# Altium PCB PCB1.PcbDoc
Units mil, origin at the board's own origin, x right, y up, seen from the top; angles counter-clockwise.
Board outline 860.03 x 640.03 mil, 2 copper layers (Top Layer, Bottom Layer); 10 components, 6 nets, 25 pads, 0 vias.
Unrouted connection lines stored in the file: 1.
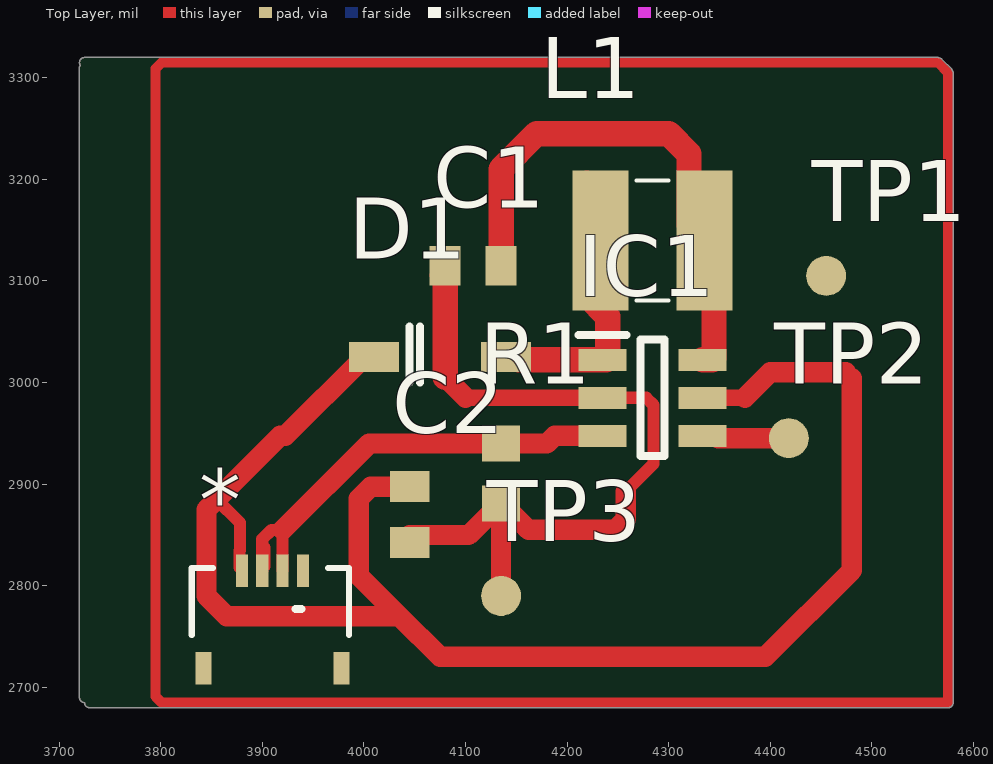
[diagram p0: Top Layer view]
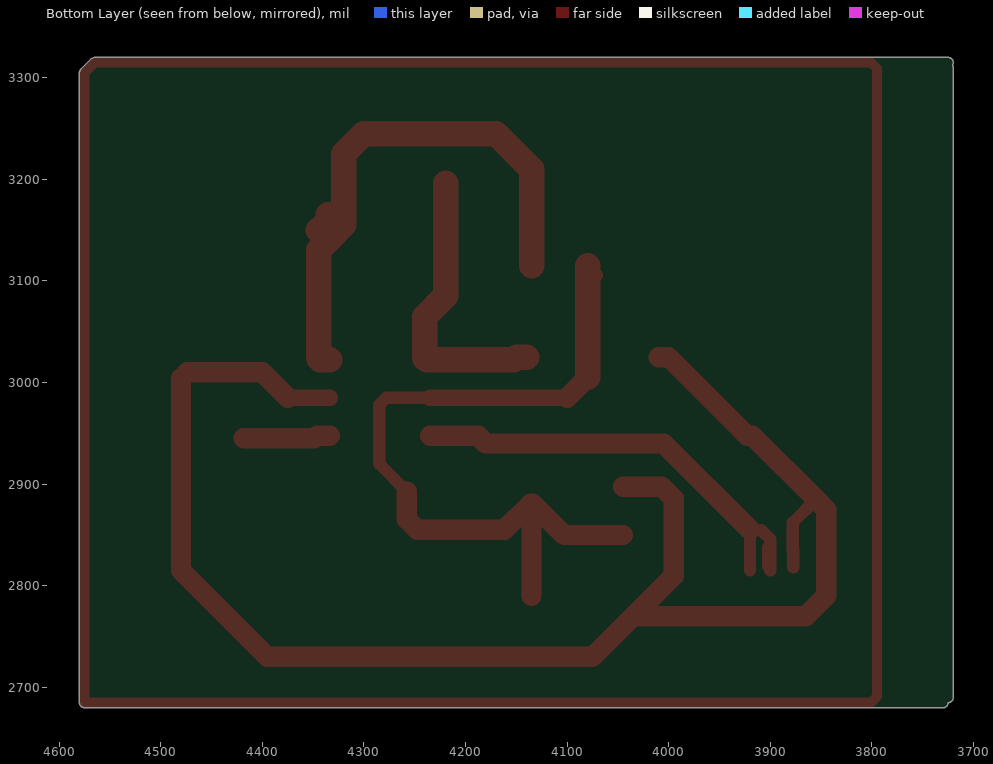
[diagram p1: Bottom Layer view, seen from below]
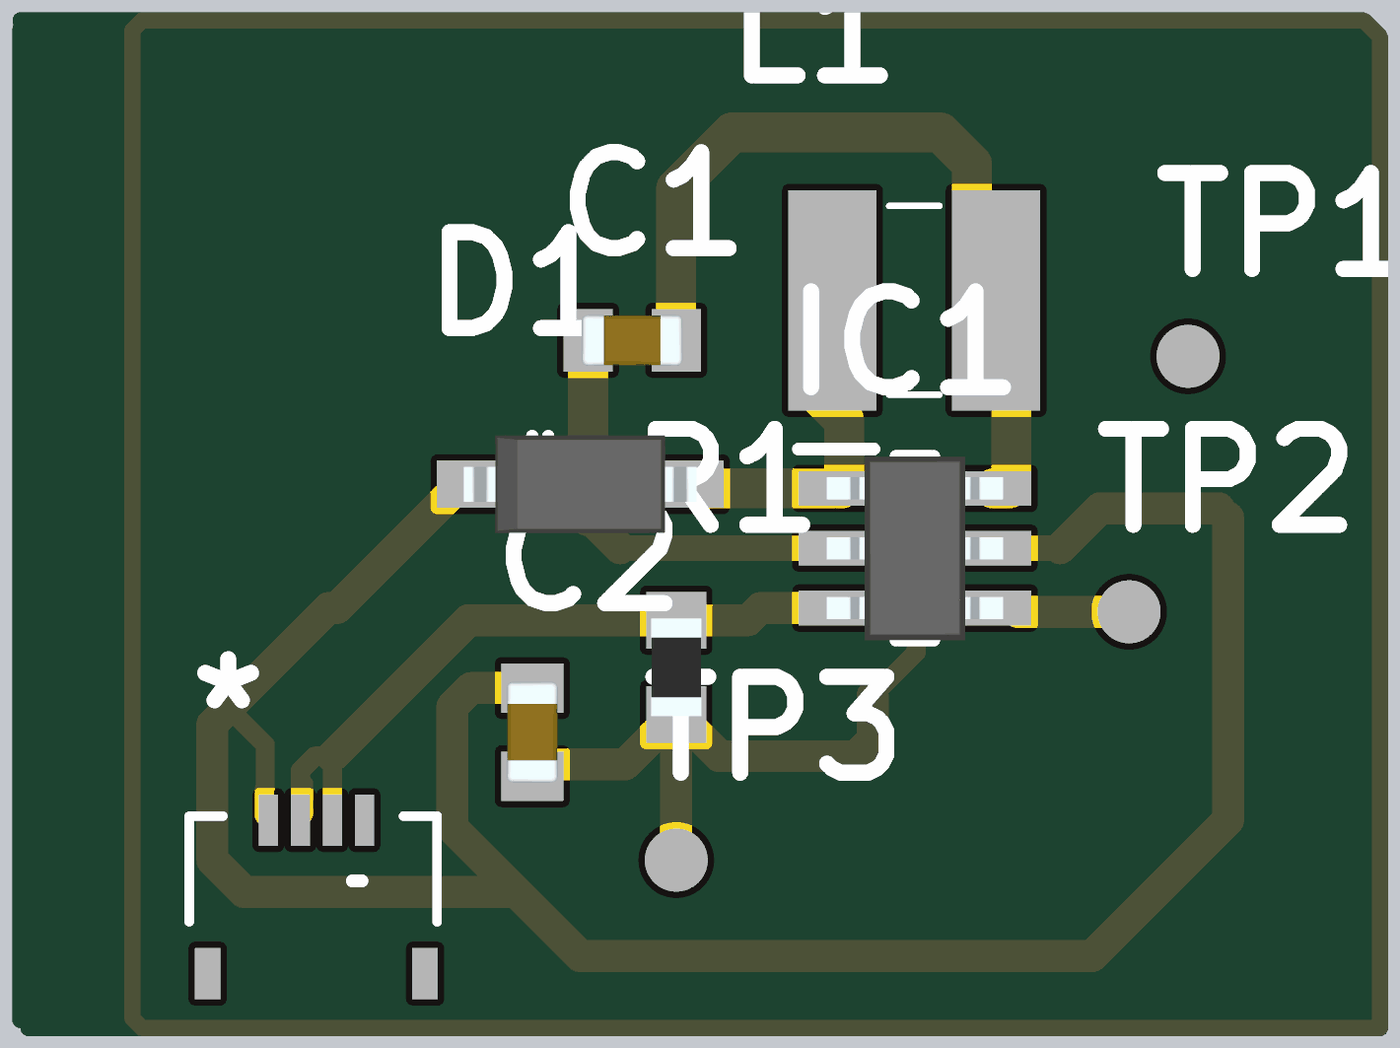
[diagram p2: 3D render of the assembled board from above, using the file's embedded part models]

## Layer stack, top to bottom
Top Solder: solder mask 0.4, Solder Resist, Dk 3.5
Top Layer: signal copper 1.4
Dielectric 1: dielectric 12.6, FR-4, Dk 4.8
Bottom Layer: signal copper 1.4
Bottom Solder: solder mask 0.4, Solder Resist, Dk 3.5

## Board outline
3719.99,2690 ccw(c3725,2690) 3724.99,2684.99 ccw(c3730,2685) 3730,2679.99 4575,2679.99 ccw(c4575,2685) 4580.02,2685 4580.02,3305 4578.55,3308.55 4568.55,3318.55 4565,3320.01 3725,3320.01 ccw(c3725,3315) 3720.65,3312.5 3719.99,3310

## Design rules (kind name [scope] priority, off if disabled: settings)
Clearance [All] p1: gap=10 ignorepadtopadclearanceinfootprint=FALSE except(0: Arc-Hole Track-Hole SMDPad-Hole THPad-Hole Via-Hole Fill-Hole Poly-Hole Region-Hole Text-Hole)
PolygonConnect [All] p1: connectstyle=Relief reliefconductorwidth=10 reliefentries=4 polygonreliefangle="90 Angle" airgapwidth=10
RoutingVias [All] p1: holewidth=28 width=50 viastyle="Through Hole" minholewidth=28 minwidth=50 maxholewidth=28 maxwidth=50
SolderMaskExpansion [All] p1: expansion=4 istentingtop=FALSE
Width [All] p1: maxlimit=100 minlimit=10 preferedwidth=20 minimp=50.000000 maximp=50.000000 favimp=50.000000
30 further rules are at their usual default settings.

## Components (designator, comment, footprint, x,y, rotation, side; value= is the part's Value field where it differs from the comment)
* "4p_zif" 4p_smd_zif 3906.54,2770.13 r0 top
C1 "1uF" "0603 Capacitor" 4107.44,3115 r0 top
C2 "1uF" "0603 Capacitor" 4045,2870 r90 top
D1 "SOD-123 Diode" SOD123 4074.96,3025 r0 top
IC1 "AP3032KTR-G1" SOT95P280X145-6N 4284.21,2985 r0 top
L1 "INDUCTOR_3x3.5" INDUCTOR_3x3.5 4283.82,3140 r180 top
R1 "0.01R" "0603 Resistor" 4135,2910.47 r90 top
TP1 "SinglePad" SinglePad1 4456.84,3104.76 r90 top
TP2 "SinglePad" SinglePad1 4420,2945 r90 top
TP3 "SinglePad" SinglePad1 4136.84,2789.76 r90 top

## Footprints (in the part's own frame and the unit in brackets; to place one, negate y for a bottom-side part, rotate by r counter-clockwise, add the part's x,y. Pads: shape width x height; smd on the part's side, far side on the other; paste and mask are expansions set on the pad)
4p_smd_zif [mil]
  rect 16x32 smd: 0(-64.54,-51.13) 0(71.46,-51.13)
  rect 12x32 smd: 1(33.46,44.87) 2(13.46,44.87) 3(-6.54,44.87) 4(-26.54,44.87)
  silkscreen extent -76,-19 79,47
"0603 Capacitor" [mm]
  rect 0.78x0.99 smd: 1(-0.7,0) 2(0.7,0)
  body extent -0.8,-0.41 0.8,0.41, height 0.9
"0603 Resistor" [mm]
  rect 0.9x0.95 smd: 1(-0.75,0) 2(0.75,0)
  body extent -0.77,-0.4 0.77,0.4, height 0.55
INDUCTOR_3x3.5 [mm]
  rect 1.4x3.5 smd: 1(-1.3,0) 2(1.3,0)
  silkscreen extent -0.4,-1.5 0.4,1.5
SinglePad1 [mm]
  round 1 smd mask+0.102: 1(0.006,0.047)
SOD123 [mm]
  rect 1.25x0.75 smd: 1(-1.65,0) 2(1.65,0)
  silkscreen extent -0.76,-0.64 -0.51,0.76, body extent -1.85,-0.77 1.85,0.77, height 1.35
SOT95P280X145-6N [mm]
  rect 1.2x0.55 smd: 1(-1.25,0.95) 2(-1.25,0) 3(-1.25,-0.95) 4(1.25,-0.95) 5(1.25,0) 6(1.25,0.95)
  silkscreen extent -1.85,-1.46 0.3,1.58, body extent -1.4,-1.46 1.4,1.46, height 1.45

## Part data
C1 C2: library part "0603 Capacitor", "Capacitor", Arrow Part Number=06031A120JAT2A, Manufacturer_Name=AVX, Mouser Part Number=581-06031A120J, Arrow Price/Stock=https://www.arrow.com/en/products/06031a120jat2a/avx, Datasheet Link=http://www.mouser.com/catalog/supplier/library/pdf/AVXSurfaceMountCeramic.pdf, Height=0.9mm, Manufacturer_Part_Number=06031A120JAT2A, Mouser Price/Stock=https://www.mouser.co.uk/ProductDetail/AVX/06031A120JAT2A?qs=tMrmimOZp5UsY%252BxF6dNGxQ%3D%3D
D1: "Diode", Arrow Part Number=1N4148W-G3-08, Manufacturer_Name=Vishay, Mouser Part Number=78-1N4148W-G3-08, Arrow Price/Stock=https://www.arrow.com/en/products/1n4148w-g3-08/vishay, Datasheet Link=https://componentsearchengine.com/Datasheets/1/1N4148W-G3-08.pdf, Height=1.35mm, Manufacturer_Part_Number=1N4148W-G3-08, Mouser Price/Stock=https://www.mouser.co.uk/ProductDetail/Vishay-Semiconductors/1N4148W-G3-08?qs=uS%252BVSIFnvp46StDBB15x4Q%3D%3D
IC1: "Integrated Circuit", Manufacturer_Name="Diodes Inc.", Mouser Part Number=621-AP3032KTR-G1, Arrow Part Number=AP3032KTR-G1, Arrow Price/Stock=https://www.arrow.com/en/products/ap3032ktr-g1/diodes-incorporated?region=nac, Datasheet Link=https://www.diodes.com/assets/Datasheets/AP3032.pdf, Height=1.45mm, Manufacturer_Part_Number=AP3032KTR-G1, Mouser Price/Stock=https://www.mouser.co.uk/ProductDetail/Diodes-Incorporated/AP3032KTR-G1?qs=x6A8l6qLYDBKP%252BiASla%2FZw%3D%3D
L1: "Inductor", Manufacturer_Name="Shuo Xing", Manufacturer_Part_Number=CD32-4R7M, Datasheet Link=http://aitendo3.sakura.ne.jp/aitendo_data/product_img/parts/coil/CD32/CD32.pdf, Height=2.4mm
R1: library part "0603 Resistor", "Resistor", Arrow Part Number=CPF0603B100RE1, Manufacturer_Name="TE Connectivity", Mouser Part Number=279-CPF0603B100RE1, Arrow Price/Stock=https://www.arrow.com/en/products/cpf0603b100re1/te-connectivity, Datasheet Link=http://www.farnell.com/datasheets/1786775.pdf, Height=0.55mm, Manufacturer_Part_Number=CPF0603B100RE1, Mouser Price/Stock=https://www.mouser.co.uk/ProductDetail/TE-Connectivity-Neohm/CPF0603B100RE1?qs=DfH2yQaBz6s2KWheq2AlNw%3D%3D

## Nets (pads, with @x,y where several pads share a name; then routed paths per layer and width w, separated by ;. In a path a pad name is that pad's centre, name@x,y a point inside that pad or via, vN(x,y) a via of type N, cw(c..) or ccw(c..) an arc to the next point about the centre after c; other vN are vias at no path point)
GND: C1.1 C2.1 IC1.2 R1.1 TP3.1 | length 795
  Top Layer w12: C1.1@4070.53,3105.65 C1.1 ; IC1.2 4277.97,2985 4285,2977.97 4285,2920 4257.8,2892.8
  Top Layer w16: 4100,2985 IC1.2
  Top Layer w20: C2.1@4045,2849.88 4102.95,2849.88 4134.02,2880.94 R1.1 ; 4079.88,3005.12 4100,2985 ; TP3.1 R1.1 ; 4257.8,2892.8 4257.8,2865.35 4247.44,2855 4161.93,2855 4135.98,2880.94 R1.1
  Top Layer w25: 4079.88,3005.12 C1.1
NetD1_2: D1.2 IC1.1 L1.2 | length 282.5
  Top Layer w25: D1.2 4149.76,3025 4152.36,3022.4 IC1.1 4238.33,3022.4 4240,3024.07 4240,3065 4219.49,3085.51 L1.2@4219.49,3196.24
PWM: IC1.4 TP2.1 | length 85.7
  Top Layer w20: IC1.4 4346.22,2947.6 4348.58,2945.24 TP2.1
VIN: C1.2 IC1.6 L1.1 TP1.1 | length 545
  Top Layer w25: C1.2 4135,3210 4170,3245 4300,3245 4319.94,3225.06 4319.94,3155.06 L1.1 4344.55,3130.45 4344.55,3024.07 4342.87,3022.4 IC1.6 ; L1.1@4335,3165 4335,3159.6 L1.1@4344.8,3149.8
VOUTA: *.4 C2.2 D1.1 IC1.5 | length 1619.7
  Top Layer w10: 4474.14,3010 4480,3004.14
  Top Layer w12: 3855,2885 3878,2862 3878,2835 3877.5,2834.5 *.4@3877.5,2818
  Top Layer w16: IC1.5 4375,2985
  Top Layer w20: D1.1 4000.16,3025 3922.78,2947.62 3917.62,2947.62 3855,2885 3845,2875 3845,2790 3865,2770 4035,2770 ; C2.2 4006.72,2897.56 3995,2885.84 3995,2810 4035,2770 ; 4375,2985 4400,3010 4474.14,3010 ; 4480,3004.14 4480,2815 4395,2730 4075,2730 4035,2770
VOUTK: *.2 *.3 IC1.3 R1.2 | length 470.7
  Top Layer w12: *.3 3900,2839.63 ; *.3@3902,2818.86 3902,2837.63 3900,2839.63 ; *.2 3920,2854.29 3920.71,2855 3920,2855 3909.06,2855 3900,2845.94 3900,2839.63
  Top Layer w20: 3920,2855 4005,2940 R1.2 4180,2940 4187.6,2947.6 IC1.3
pads on no net: *.0 *.1
copper on no net: | length 2807.3
  Top Layer w10: 3795,2690.86 3800.86,2685 4575,2685 4575,3290 4575,3305 4565,3315 3800.86,3315 3795,3309.14 3795,2690.86